# Altium PCB PCB_TKeyboard2_2021-07-30.pcbdoc
Units mil, origin at the board's own origin, x right, y up, seen from the top; angles counter-clockwise.
Board outline 8230 x 5770 mil, 2 copper layers (Top Layer, Bottom Layer); 75 components, 74 nets, 389 pads, 30 vias.
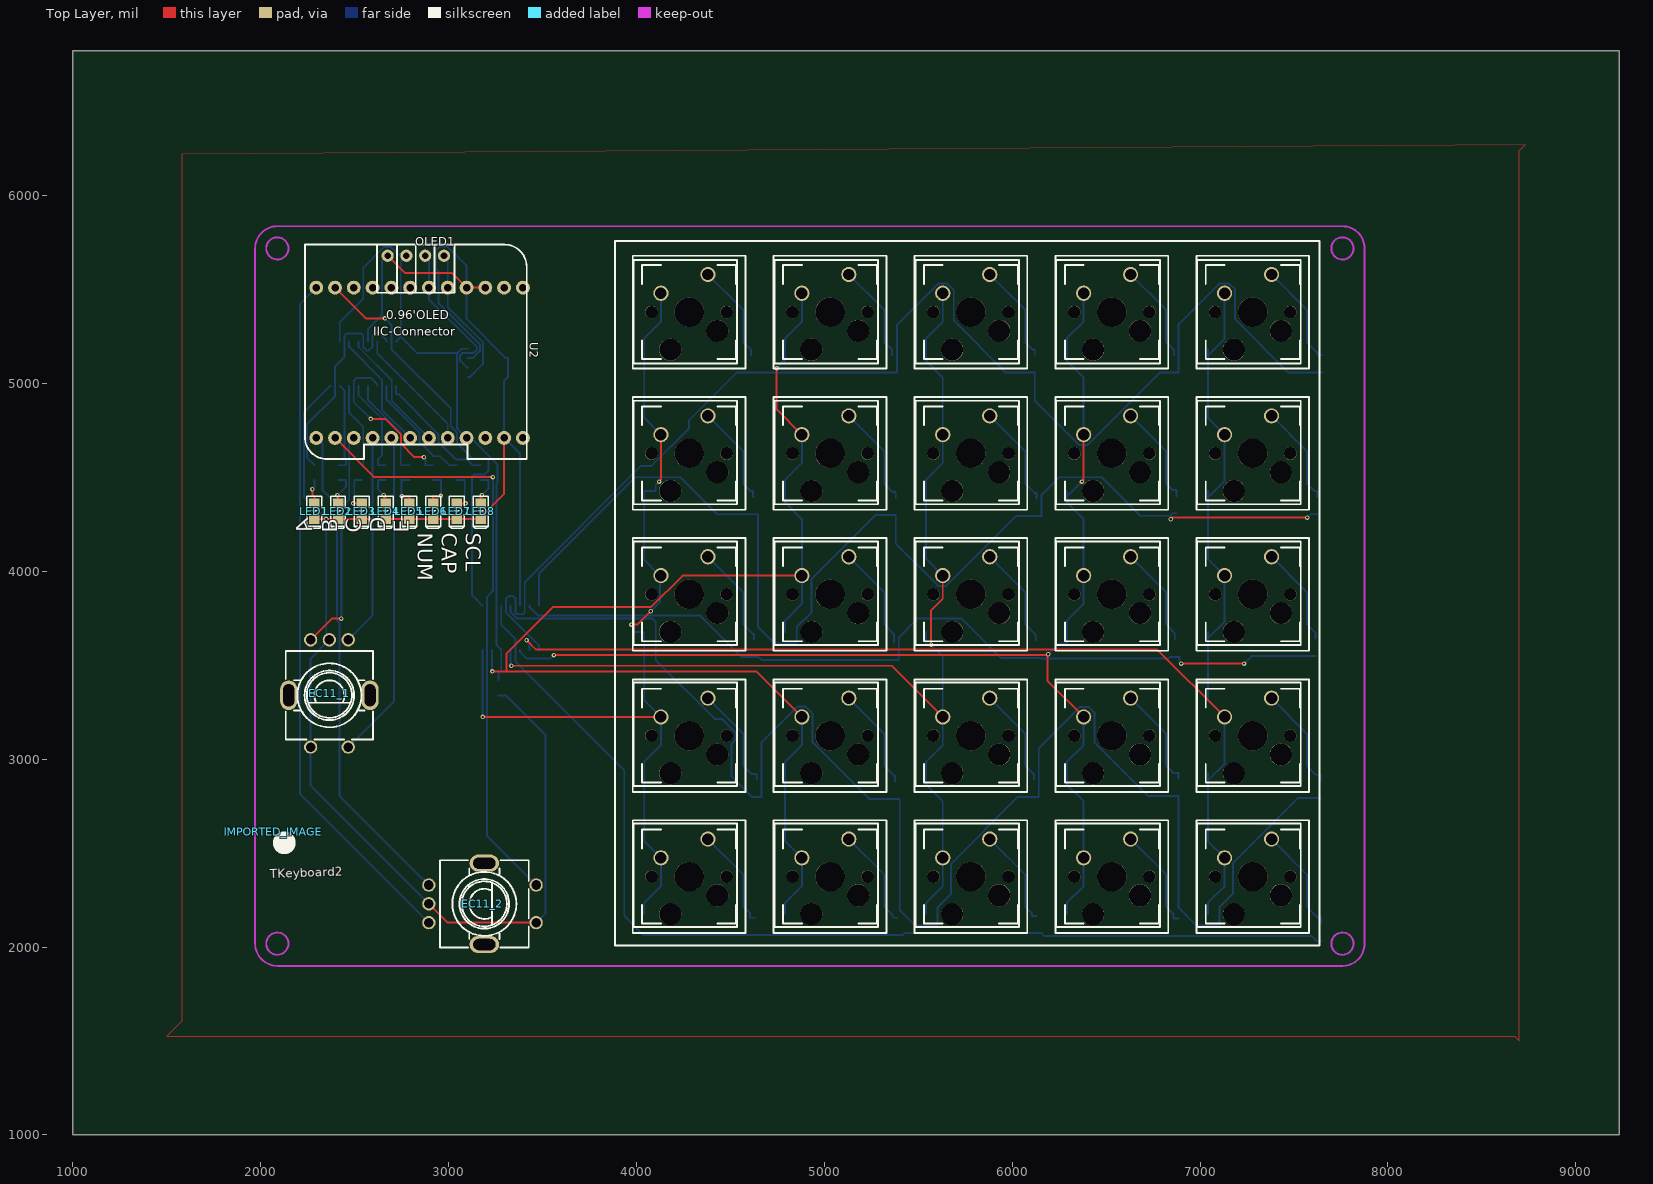
[diagram p0: Top Layer view]
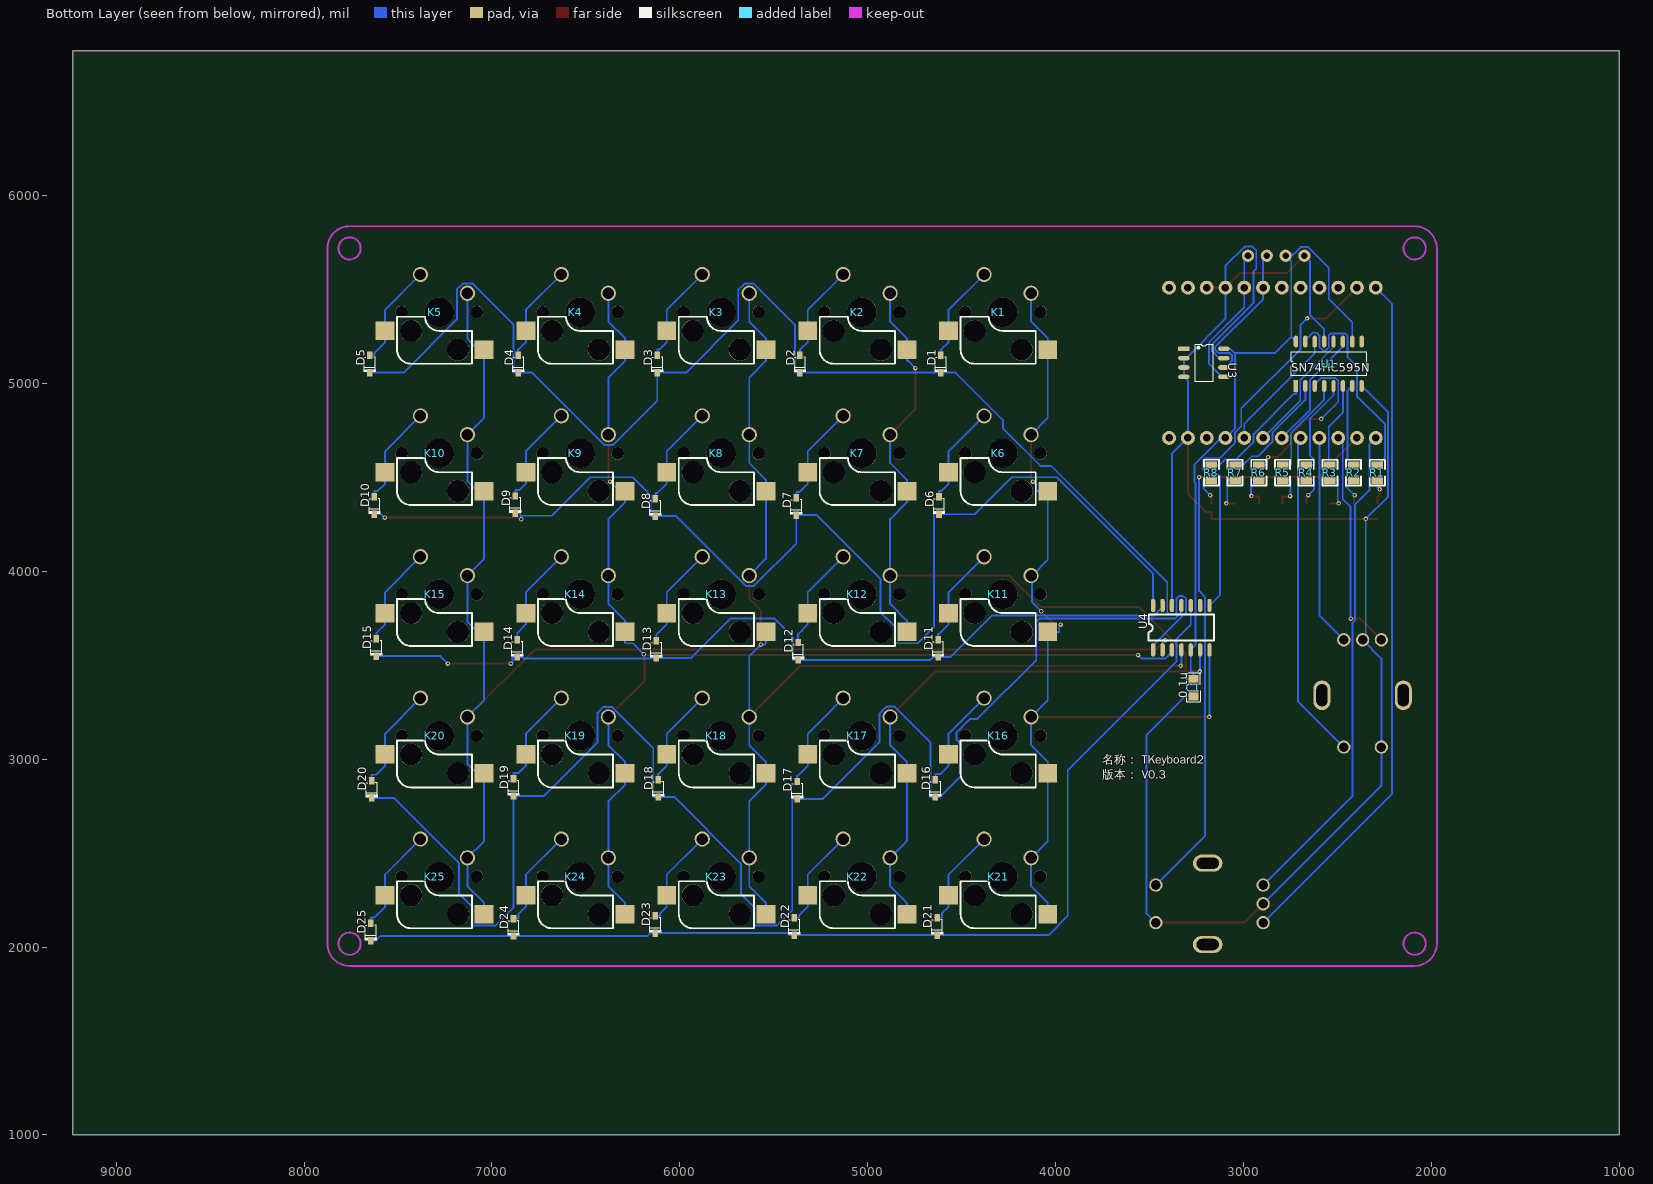
[diagram p1: Bottom Layer view, seen from below]

## Layer stack, top to bottom
Top Layer: signal copper (thickness not stored)
Dielectric: dielectric 12.6, FR-4, Dk 4.8
Bottom Layer: signal copper (thickness not stored)

## Board outline
9230,1000 1000,1000 1000,6770 9230,6770

## Components (designator, comment, footprint, x,y, rotation, side; value= is the part's Value field where it differs from the comment)
C1 "0.1u" C0805 3265,3380 r270 bottom
D1 "1N4148WS" SOD-323_L1.8-W1.3-LS2.5-RD 4610,5103.98 r270 bottom
D2 "1N4148WS" SOD-323_L1.8-W1.3-LS2.5-RD 5360,5103.98 r270 bottom
D3 "1N4148WS" SOD-323_L1.8-W1.3-LS2.5-RD 6120,5103.98 r270 bottom
D4 "1N4148WS" SOD-323_L1.8-W1.3-LS2.5-RD 6860,5103.98 r270 bottom
D5 "1N4148WS" SOD-323_L1.8-W1.3-LS2.5-RD 7650,5103.98 r270 bottom
D6 "1N4148WS" SOD-323_L1.8-W1.3-LS2.5-RD 4620,4350 r270 bottom
D7 "1N4148WS" SOD-323_L1.8-W1.3-LS2.5-RD 5380,4345 r270 bottom
D8 "1N4148WS" SOD-323_L1.8-W1.3-LS2.5-RD 6130,4340 r270 bottom
D9 "1N4148WS" SOD-323_L1.8-W1.3-LS2.5-RD 6875,4355 r270 bottom
D10 "1N4148WS" SOD-323_L1.8-W1.3-LS2.5-RD 7625,4350 r270 bottom
D11 "1N4148WS" SOD-323_L1.8-W1.3-LS2.5-RD 4625,3590 r270 bottom
D12 "1N4148WS" SOD-323_L1.8-W1.3-LS2.5-RD 5370,3575 r270 bottom
D13 "1N4148WS" SOD-323_L1.8-W1.3-LS2.5-RD 6125,3585 r270 bottom
D14 "1N4148WS" SOD-323_L1.8-W1.3-LS2.5-RD 6865,3590 r270 bottom
D15 "1N4148WS" SOD-323_L1.8-W1.3-LS2.5-RD 7615,3595 r270 bottom
D16 "1N4148WS" SOD-323_L1.8-W1.3-LS2.5-RD 4640,2845 r270 bottom
D17 "1N4148WS" SOD-323_L1.8-W1.3-LS2.5-RD 5375,2835 r270 bottom
D18 "1N4148WS" SOD-323_L1.8-W1.3-LS2.5-RD 6115,2845 r270 bottom
D19 "1N4148WS" SOD-323_L1.8-W1.3-LS2.5-RD 6885,2850 r270 bottom
D20 "1N4148WS" SOD-323_L1.8-W1.3-LS2.5-RD 7640,2840 r270 bottom
D21 "1N4148WS" SOD-323_L1.8-W1.3-LS2.5-RD 4630,2110 r270 bottom
D22 "1N4148WS" SOD-323_L1.8-W1.3-LS2.5-RD 5390,2110 r270 bottom
D23 "1N4148WS" SOD-323_L1.8-W1.3-LS2.5-RD 6130,2120 r270 bottom
D24 "1N4148WS" SOD-323_L1.8-W1.3-LS2.5-RD 6885,2105 r270 bottom
D25 "1N4148WS" SOD-323_L1.8-W1.3-LS2.5-RD 7645,2080 r270 bottom
EC11_1 "EC11E152T409" SW-TH_EC11XXXXXXXX 2365,3350 r180 top
EC11_2 "EC11E152T409" SW-TH_EC11XXXXXXXX 3180,2230 r270 top
IMPORTED_IMAGE "IMPORTED_IMAGE" IMPORTED_IMAGE 2066.05,2613.96 r0 top
K1 "CHERRY" 轴座_焊接热插拔_不带灯 4280,5380 r0 top
K2 "CHERRY" 轴座_焊接热插拔_不带灯 5030,5380 r0 top
K3 "CHERRY" 轴座_焊接热插拔_不带灯 5780,5380 r0 top
K4 "CHERRY" 轴座_焊接热插拔_不带灯 6530,5380 r0 top
K5 "CHERRY" 轴座_焊接热插拔_不带灯 7280,5380 r0 top
K6 "CHERRY" 轴座_焊接热插拔_不带灯 4280,4627.5 r0 top
K7 "CHERRY" 轴座_焊接热插拔_不带灯 5030,4627.5 r0 top
K8 "CHERRY" 轴座_焊接热插拔_不带灯 5780,4627.5 r0 top
K9 "CHERRY" 轴座_焊接热插拔_不带灯 6530,4627.5 r0 top
K10 "CHERRY" 轴座_焊接热插拔_不带灯 7280,4627.5 r0 top
K11 "CHERRY" 轴座_焊接热插拔_不带灯 4280,3877.5 r0 top
K12 "CHERRY" 轴座_焊接热插拔_不带灯 5030,3877.5 r0 top
K13 "CHERRY" 轴座_焊接热插拔_不带灯 5780,3877.5 r0 top
K14 "CHERRY" 轴座_焊接热插拔_不带灯 6530,3877.5 r0 top
K15 "CHERRY" 轴座_焊接热插拔_不带灯 7280,3877.5 r0 top
K16 "CHERRY" 轴座_焊接热插拔_不带灯 4280,3125 r0 top
K17 "CHERRY" 轴座_焊接热插拔_不带灯 5030,3125 r0 top
K18 "CHERRY" 轴座_焊接热插拔_不带灯 5780,3125 r0 top
K19 "CHERRY" 轴座_焊接热插拔_不带灯 6530,3125 r0 top
K20 "CHERRY" 轴座_焊接热插拔_不带灯 7280,3125 r0 top
K21 "CHERRY" 轴座_焊接热插拔_不带灯 4280,2375 r0 top
K22 "CHERRY" 轴座_焊接热插拔_不带灯 5030,2375 r0 top
K23 "CHERRY" 轴座_焊接热插拔_不带灯 5780,2375 r0 top
K24 "CHERRY" 轴座_焊接热插拔_不带灯 6530,2375 r0 top
K25 "CHERRY" 轴座_焊接热插拔_不带灯 7280,2375 r0 top
LED1 "LED-0805_R" LED0805_RED 2285,4320 r270 top
LED2 "LED-0805_R" LED0805_RED 2411.43,4320 r270 top
LED3 "LED-0805_R" LED0805_RED 2537.86,4320 r270 top
LED4 "LED-0805_R" LED0805_RED 2664.29,4320 r270 top
LED5 "LED-0805_R" LED0805_RED 2790.71,4320 r270 top
LED6 "LED-0805_R" LED0805_RED 2917.14,4320 r270 top
LED7 "LED-0805_R" LED0805_RED 3043.57,4320 r270 top
LED8 "LED-0805_R" LED0805_RED 3170,4320 r270 top
OLED1 "0.96OLED_4P" 0.96OLED_4P 2825,5680 r0 top
R1 "1k" R0805 2286.57,4525 r90 bottom
R2 "1k" R0805 2412.78,4525 r90 bottom
R3 "1k" R0805 2538.98,4525 r90 bottom
R4 "1k" R0805 2665.18,4525 r90 bottom
R5 "1k" R0805 2791.39,4525 r90 bottom
R6 "1k" R0805 2917.59,4525 r90 bottom
R7 "1k" R0805 3043.8,4525 r90 bottom
R8 "1k" R0805 3170,4525 r90 bottom
U1 "SN74HC595N" SOP16 2545,5105 r270 bottom
U2 "Arduino Pro Micro" "ARDUINO PRO MICRO_MINI" 3395,5510 r270 top
U3 "AT24C04C-SSHM-T" SOP8 3210,5110 r90 bottom
U4 "BC6301" SOP-14_L8.6-W3.9-P1.27-LS6.0-TL 3330,3700 r270 bottom

## Footprints (in the part's own frame and the unit in brackets; to place one, negate y for a bottom-side part, rotate by r counter-clockwise, add the part's x,y. Pads: shape width x height; smd on the part's side, far side on the other; paste and mask are expansions set on the pad)
0.96OLED_4P [mm]
  round 1.65 hole 0.89: 1(-3.81,-0.001) 2(-1.27,0.002) 3(1.27,0.002) 4(3.81,0.002)
  silkscreen extent -15,-27.5 15,1.5
"ARDUINO PRO MICRO_MINI" [mil]
  round 74 hole 40: 1(0,0) 2(0,-100) 3(0,-200) 4(0,-300) 5(0,-400) 6(0,-499.99) 7(0,-599.99) 8(0,-700) 9(0,-800) 10(0,-900) 11(0,-1000) 12(0,-1100) 13(800,-1100) 14(800,-1000) 15(800,-900) 16(800,-799.99) 17(800,-699.99) 18(800,-600) 19(800,-499.99) 20(800,-400.01) 21(800,-300) 22(800,-200) 23(800,-100) 24(800,0)
C0805 [mm]
  rect 1.41x1.35 smd: 1(1.03,0) 2(-1.03,0)
  silkscreen extent -1.96,-0.9 1.96,0.9
IMPORTED_IMAGE [mil]
  silkscreen extent 0,-118 118,0
LED0805_RED [mil]
  rect 51.2x55.1 smd: 1(-41.35,0) 2(41.35,0)
  silkscreen extent -79,-39 91,39
R0805 [mm]
  rect 1x1.55 smd: 1(1,0) 2(-1,0)
  silkscreen extent -1.75,-1.02 1.75,1.02
SOD-323_L1.8-W1.3-LS2.5-RD [mm]
  rect 1x0.75 smd: 1(1.173,0) 2(-1.173,0)
  silkscreen extent -0.9,-0.8 1.08,0.8
SOP8 [mil]
  rect 24x61 smd: 1(75,106.3)
  oval 24x61 smd: 2(25,106.3) 3(-25,106.3) 4(-75,106.3) 5(-75,-106.3) 6(-25,-106.3) 7(25,-106.3) 8(75,-106.3)
  silkscreen extent -100,-47 100,47
SOP16 [mm]
  rect 1.6x0.6 smd: 1(3,-4.445)
  oval 1.6x0.6 smd: 2(3,-3.175) 3(3,-1.905) 4(3,-0.635) 5(3,0.635) 6(3,1.905) 7(3,3.175) 8(3,4.445) 9(-3,4.445) 10(-3,3.175) 11(-3,1.905) 12(-3,0.635) 13(-3,-0.635) 14(-3,-1.905) 15(-3,-3.175) 16(-3,-4.445)
  silkscreen extent -1.6,-5.08 1.6,5.08
SOP-14_L8.6-W3.9-P1.27-LS6.0-TL [mm]
  oval 1.8x0.6 smd: 1(3,-3.81) 2(3,-2.54) 3(3,-1.27) 4(3,0) 5(3,1.27) 6(3,2.54) 7(3,3.81) 8(-3,3.81) 9(-3,2.54) 10(-3,1.27) 11(-3,0) 12(-3,-1.27) 13(-3,-2.54) 14(-3,-3.81)
  silkscreen extent -1.78,-4.44 1.75,4.4
SW-TH_EC11XXXXXXXX [mm]
  oval 2.3x4 hole 1.5 slot 3 at 90 deg: 6(5.5,0.25) 7(-5.5,0.25)
  round 1.8 hole 1.3: A(-2.54,-7.25) B(2.54,-7.25) C(0,-7.25) D(-2.54,7.25) E(2.54,7.25)
  silkscreen extent -5.9,-5.75 5.9,6.25
轴座_焊接热插拔_不带灯 [mil]
  rect 100.39x98.42 smd far side: 1(-238.76,-200) 2(288.84,-100)
  round 81 hole 61: 1(-149.91,99.99) 2(100.09,199.99)
  round 67 hole 67 unplated: ""(-199.96,0) ""(200.04,0)
  round 118.11 hole 118.11 unplated: ""(-99.96,-200) ""(150.04,-100)
  round 157 hole 157 unplated: ""(0.04,0)
  silkscreen extent -300,-300 300,300

## Via types
v1: diameter 24.02, hole 12.01, Top Layer to Bottom Layer, 30 vias

## Nets (pads, with @x,y where several pads share a name; then routed paths per layer and width w, separated by ;. In a path a pad name is that pad's centre, name@x,y a point inside that pad or via, vN(x,y) a via of type N, cw(c..) or ccw(c..) an arc to the next point about the centre after c; other vN are vias at no path point)
C0: K1.1 K6.1 K11.1 K16.1 K21.1 U4.7 | length 5090.6
  Top Layer w10: v1(3181.4,3225) K16.1@4130.08,3225 ; v1(3972.58,3716.31) 4004.47,3716.31 v1(4075.63,3787.47) ; v1@4120.15,4477.86 4130.08,4487.79 K6.1@4130.08,4727.5
  Bottom Layer w10: U4.7 3180,3226.4 v1(3181.4,3225) ; v1(3972.58,3716.31) 3979.97,3708.92 3979.97,3677.5 4041.24,3677.5 4041.24,3313.84 4130.08,3225 4130.08,3074.11 4041.24,2985.27 4041.24,2925 4041.24,2563.84 4130.08,2475 4130.08,2324.11 4041.24,2235.27 K21.1@4041.24,2175 ; v1(4075.63,3787.47) 4124.62,3836.46 K11.1@4124.62,3977.5 ; v1@4120.15,4477.86 4102.51,4460.22 4102.51,4427.5 4041.24,4427.5 4041.24,4060.88 K11.1@4124.62,3977.5 ; K11.1@4130.08,3977.5 K11.1@4124.62,3977.5 ; K6.1@4130.08,4727.5 4041.24,4816.34 4041.24,5180 4041.24,5240.27 4130.08,5329.11 K1.1@4130.08,5480
  other v1: 4120.15,4477.86
C1: K2.1 K7.1 K12.1 K17.1 K22.1 U4.6 | length 6892.8
  Top Layer w10: v1(3233.01,3467.23) 3307.4,3467.23 ; v1(4745.22,5081.89) 4745.22,4862.36 K7.1@4880.08,4727.5 ; K17.1@4880.08,3225 4637.85,3467.23 3307.4,3467.23 ; K12.1@4880.08,3977.5 4245.05,3977.5 4078.1,3810.55 3555.68,3810.55 3307.4,3562.27 3307.4,3467.23
  Bottom Layer w10: U4.6 3230,3470.24 v1(3233.01,3467.23) ; v1(4745.22,5081.89) 4783.06,5119.73 4791.24,5119.73 4791.24,5180 4791.24,5240.27 4880.08,5329.11 K2.1@4880.08,5480 ; K22.1@4791.24,2175 4791.24,2235.27 4880.08,2324.11 4880.08,2475 4791.24,2563.84 4791.24,2925 4791.24,2985.27 4880.08,3074.11 K17.1@4880.08,3225 ; K12.1@4791.24,3677.5 4791.24,3737.77 4880.08,3826.61 4880.08,3977.5 4880.08,4278.39 4791.24,4367.23 4791.24,4427.5 4791.24,4487.77 4880.08,4576.61 K7.1@4880.08,4727.5
C2: K3.1 K8.1 K13.1 K18.1 K23.1 U4.4 | length 6198.7
  Top Layer w10: v1(3334.39,3497.65) 5357.43,3497.65 K18.1@5630.08,3225 ; v1(5568.29,3610.24) 5568.29,3792.43 5630.08,3854.22 K13.1@5630.08,3977.5
  Bottom Layer w10: U4.4 3330,3502.04 v1(3334.39,3497.65) ; K23.1@5541.24,2175 5541.24,2235.27 5630.08,2324.11 5630.08,2475 5630.08,2775.89 5541.24,2864.73 5541.24,2925 5541.24,2985.27 5630.08,3074.11 5630.08,3225 5630.08,3548.45 v1(5568.29,3610.24) 5548.23,3610.24 5541.24,3617.23 K13.1@5541.24,3677.5 ; K13.1@5630.08,3977.5 5541.24,4066.34 5541.24,4427.5 5541.24,4487.77 5630.08,4576.61 5630.08,4727.5 5630.08,5030.89 5541.24,5119.73 5541.24,5180 5541.24,5240.27 5630.08,5329.11 K3.1@5630.08,5480
C3: K4.1 K9.1 K14.1 K19.1 K24.1 U4.3 | length 6618
  Top Layer w10: v1(3560.02,3554.44) v1@6186.93,3554.44 ; v1(6191.29,3558.8) v1@6186.93,3554.44 ; v1(6371.09,4477.7) 6380.08,4486.69 K9.1@6380.08,4727.5 ; K19.1@6380.08,3225 6186.93,3418.15 v1@6186.93,3554.44
  Bottom Layer w10: U4.3 3380,3570.55 3415.44,3535.11 3540.69,3535.11 v1(3560.02,3554.44) ; v1(6191.29,3558.8) 6249.72,3617.23 6291.24,3617.23 6291.24,3677.5 6291.24,3737.77 6380.08,3826.61 6380.08,3977.5 6380.08,4278.39 6291.24,4367.23 K9.1@6291.24,4397.37 ; K24.1@6291.24,2175 6291.24,2235.27 6380.08,2324.11 6380.08,2475 6380.08,2775.89 6291.24,2864.73 6291.24,2894.87 6291.24,2925 6291.24,2985.27 6380.08,3074.11 K19.1@6380.08,3225 ; K9.1@6291.24,4427.5 K9.1@6291.24,4397.37 ; v1(6371.09,4477.7) 6371.09,4477.22 K9.1@6291.24,4397.37 ; K9.1@6380.08,4727.5 6380.08,5030.89 6291.24,5119.73 6291.24,5180 6291.24,5240.27 6380.08,5329.11 K4.1@6380.08,5480
C4: K5.1 K10.1 K15.1 K20.1 K25.1 U4.2 | length 7814.6
  Top Layer w10: v1(3414.71,3633.44) 3464.91,3583.24 6771.84,3583.24 K20.1@7130.08,3225
  Bottom Layer w10: v1(3414.71,3633.44) 3430,3618.15 U4.2 ; K25.1@7041.24,2175 7041.24,2235.27 7130.08,2324.11 7130.08,2475 7041.24,2563.84 7041.24,2866.83 ; K20.1@7041.24,2925 7041.24,2866.83 ; K15.1@7041.24,3677.5 7041.24,3617.24 ; K10.1@7041.24,4427.5 7041.24,4367.45 ; K5.1@7041.24,5180 7041.24,5122.49 ; K5.1@7130.08,5480 7130.08,5237.01 7041.24,5148.17 7041.24,5122.49 ; 7041.24,2866.83 7041.24,2886.49 7130.08,2975.33 7130.08,3225 7041.24,3313.84 7041.24,3617.24 ; 7041.24,3617.24 7041.24,3643.88 7130.08,3732.72 7130.08,3977.5 7041.24,4066.34 7041.24,4367.45 ; 7041.24,4367.45 7041.24,4392.73 7130.08,4481.57 7130.08,4727.5 7041.24,4816.34 7041.24,5122.49
CLK1: EC11_1.B U2.15 | length 1199.5
  Top Layer w10: EC11_1.B 2378.19,3748.61 v1(2428.8,3748.61)
  Bottom Layer w10: v1(2428.8,3748.61) 2428.8,4342.78 2470.46,4384.44 2470.46,4685.46 U2.15
CLK2: EC11_2.B U2.12 | length 3700.5
  Bottom Layer w10: U2.12 2207.93,5422.93 2207.93,2816.63 EC11_2.B
CLOCK: U1.11 U2.18 | length 647.7
  Bottom Layer w10: U1.11 2470,5194.38 2645,5019.38 2645,4860 U2.18
DATA: U1.14 U2.20 | length 668.4
  Bottom Layer w10: U1.14 2620,5160.9 2995,4785.9 U2.20
DT1: EC11_1.A U2.16 | length 1128.4
  Bottom Layer w10: EC11_1.A 2595,3765.42 U2.16
DT2: EC11_2.A U2.13 | length 2628.3
  Bottom Layer w10: U2.13 2328.9,4676.1 2328.9,4430.72 2405.72,4353.9 2405.72,3739.05 2418.5,3726.27 2418.5,2806.06 EC11_2.A
GND: C1.1 EC11_1.C EC11_1.E EC11_2.C EC11_2.E LED1.2 LED2.2 LED3.2 LED4.2 LED5.2 LED6.2 LED7.2 LED8.2 OLED1.1 U1.8 U1.13 U2.3 U2.4 U2.23 U3.2 U3.3 U3.4 U3.7 U4.12 | length 10492.4
  Top Layer w10: LED1.2 v1(2348.22,4278.65) LED2.2 LED3.2 LED4.2 LED5.2 LED6.2 LED7.2 LED8.2 3170,4315.32 3197.5,4315.32 3295,4412.82 U2.23 ; OLED1.1@2675,5679.95 2766.73,5588.22 3016.78,5588.22 U2.4 U2.3 ; EC11_2.C 2994.56,2130 EC11_2.E
  Bottom Layer w10: U1.8 2229.44,4846.33 2229.44,4397.43 v1(2348.22,4278.65) 2348.22,3652.22 EC11_1.C 2265.01,3535.43 EC11_1.E 2265.01,2859.55 EC11_2.C ; U1.13 2570,5288.39 2645,5363.39 2645,5649.95 OLED1.1@2675,5679.95 ; U3.7 3128.08,5135 3166.59,5173.51 3166.59,5207.57 2945,5429.16 2945,5596.29 2931.44,5609.85 2931.44,5708.13 2951.75,5728.44 2992.39,5728.44 3095,5625.83 U2.4 3095,5344.64 3304.64,5135 U3.2 U3.3 U3.4 3295,5013.7 U2.23 3380,4625 U4.12 ; C1.1 3302.65,3339.45 3515.6,3126.5 3515.6,2180.17 EC11_2.E
K1_2: D1.2 K1.2 | length 526.5
  Bottom Layer w10: K1.2@4380.08,5580 4568.84,5391.24 4568.84,5280 4568.84,5219.73 4607.68,5180.89 4610,5180.89 D1.2
K2_2: D2.2 K2.2 | length 526.5
  Bottom Layer w10: K2.2@5130.08,5580 5318.84,5391.24 5318.84,5280 5318.84,5219.73 5357.68,5180.89 5360,5180.89 D2.2
K3_2: D3.2 K3.2 | length 536.5
  Bottom Layer w10: K3.2@5880.08,5580 6068.84,5391.24 6068.84,5280 6068.84,5219.73 6107.68,5180.89 6120,5180.89 D3.2
K4_2: D4.2 K4.2 | length 526.5
  Bottom Layer w10: K4.2@6630.08,5580 6818.84,5391.24 6818.84,5280 6818.84,5219.73 6857.68,5180.89 6860,5180.89 D4.2
K5_2: D5.2 K5.2 | length 556.8
  Bottom Layer w10: K5.2@7380.08,5580 7568.84,5391.24 7568.84,5280 7568.84,5219.73 7624.17,5164.4 7624.17,5150.14 D5.2
K6_2: D6.2 K6.2 | length 537.1
  Bottom Layer w10: K6.2@4380.08,4827.5 4568.84,4638.74 4568.84,4527.5 4568.84,4467.23 4609.15,4426.92 4620,4426.92 D6.2
K7_2: D7.2 K7.2 | length 549.1
  Bottom Layer w10: K7.2@5130.08,4827.5 5318.84,4638.74 5318.84,4527.5 5318.84,4467.23 5364.15,4421.92 5380,4421.92 D7.2
K8_2: D8.2 K8.2 | length 551.2
  Bottom Layer w10: K8.2@5880.08,4827.5 6068.84,4638.74 6068.84,4527.5 6068.84,4467.23 6119.15,4416.92 6130,4416.92 D8.2
K9_2: D9.2 K9.2 | length 540
  Bottom Layer w10: K9.2@6630.08,4827.5 6818.84,4638.74 6818.84,4527.5 6818.84,4467.23 6854.15,4431.92 6875,4431.92 D9.2
K10_2: D10.2 K10.2 | length 542.1
  Bottom Layer w10: K10.2@7380.08,4827.5 7568.84,4638.74 7568.84,4527.5 7568.84,4467.23 7609.15,4426.92 7625,4426.92 D10.2
K11_2: D11.2 K11.2 | length 546.2
  Bottom Layer w10: K11.2@4380.08,4077.5 4568.84,3888.74 4568.84,3777.5 4568.84,3717.23 4619.15,3666.92 4625,3666.92 D11.2
K12_2: D12.2 K12.2 | length 555.7
  Bottom Layer w10: K12.2@5130.08,4077.5 5318.84,3888.74 5318.84,3777.5 5318.84,3717.23 5370,3666.07 D12.2
K13_2: D13.2 K13.2 | length 548.3
  Bottom Layer w10: K13.2@5880.08,4077.5 6068.84,3888.74 6068.84,3777.5 6068.84,3717.23 6124.15,3661.92 6125,3661.92 D13.2
K14_2: D14.2 K14.2 | length 538.6
  Bottom Layer w10: K14.2@6630.08,4077.5 6818.84,3888.74 6818.84,3777.5 6818.84,3717.23 6865,3671.07 D14.2
K15_2: D15.2 K15.2 | length 534.1
  Bottom Layer w10: K15.2@7380.08,4077.5 7568.84,3888.74 7568.84,3777.5 7568.84,3717.23 7614.15,3671.92 7615,3671.92 D15.2
K16_2: D16.2 K16.2 | length 558.1
  Bottom Layer w10: K16.2@4380.08,3325 4568.84,3136.24 4568.84,3025 4568.84,2964.73 4611.65,2921.92 4640,2921.92 D16.2
K17_2: D17.2 K17.2 | length 547.3
  Bottom Layer w10: K17.2@5130.08,3325 5318.84,3136.24 5318.84,3025 5318.84,2964.73 5371.65,2911.92 5375,2911.92 D17.2
K18_2: D18.2 K18.2 | length 533.1
  Bottom Layer w10: K18.2@5880.08,3325 6068.84,3136.24 6068.84,3025 6068.84,2964.73 6111.65,2921.92 6115,2921.92 D18.2
K19_2: D19.2 K19.2 | length 551
  Bottom Layer w10: K19.2@6630.08,3325 6818.84,3136.24 6818.84,3025 6818.84,2964.73 6856.65,2926.92 6885,2926.92 D19.2
K20_2: D20.2 K20.2 | length 560.2
  Bottom Layer w10: K20.2@7380.08,3325 7568.84,3136.24 7568.84,3025 7568.84,2964.73 7616.65,2916.92 7640,2916.92 D20.2
K21_2: D21.2 K21.2 | length 537.5
  Bottom Layer w10: K21.2@4380.08,2575 4568.84,2386.24 4568.84,2275 4568.84,2214.73 4604.17,2179.4 4604.17,2156.16 D21.2
K22_2: D22.2 K22.2 | length 541.6
  Bottom Layer w10: K22.2@5130.08,2575 5318.84,2386.24 5318.84,2275 5318.84,2214.73 5364.17,2169.4 5364.17,2156.16 D22.2
K23_2: D23.2 K23.2 | length 527.5
  Bottom Layer w10: K23.2@5880.08,2575 6068.84,2386.24 6068.84,2275 6068.84,2214.73 6104.17,2179.4 6104.17,2166.16 D23.2
K24_2: D24.2 K24.2 | length 544.6
  Bottom Layer w10: K24.2@6630.08,2575 6818.84,2386.24 6818.84,2275 6818.84,2214.73 6859.17,2174.4 6859.17,2151.16 D24.2
K25_2: D25.2 K25.2 | length 569.3
  Bottom Layer w10: K25.2@7380.08,2575 7568.84,2386.24 7568.84,2275 7568.84,2214.73 7626.65,2156.92 7645,2156.92 D25.2
KEY_TX: U2.11 U4.8 | length 2226.7
  Top Layer w10: U2.11 2558.68,5346.32 v1(2660.57,5346.32)
  Bottom Layer w10: v1(2660.57,5346.32) 2695,5311.89 2695,5182.99 3011.1,4866.89 3011.1,4771.13 3045,4737.23 3045,4682.92 3127.94,4599.98 3205.02,4599.98 3211.59,4593.41 3211.59,4536.54 3191.44,4516.39 3134.91,4516.39 3125.01,4506.49 3125.01,3873.1 U4.8
LATCH: U1.12 U2.19 | length 668.4
  Bottom Layer w10: U1.12 2520,5194.09 2697.12,5016.97 2697.12,4907.88 U2.19
LED1: R1.1 U1.15 | length 1193.6
  Bottom Layer w10: R1.1 2245.54,4605.4 2245.54,4782.84 2395,4932.3 2395,5090.69 2446.41,5142.1 2446.41,5256.92 2455.17,5265.68 2535.77,5265.68 2545,5256.45 2545,5191.86 2562.84,5174.02 2572.97,5174.02 2595,5196.05 2595,5254.57 2610.29,5269.86 2630.9,5269.86 2670,5230.76 U1.15
LED2: R2.1 U1.7 | length 478.3
  Bottom Layer w10: R2.1 2454.36,4564.37 2454.36,4592.2 2446.43,4600.13 2446.43,4960.46 U1.7
LED3: R3.1 U1.6 | length 456.1
  Bottom Layer w10: U1.6 2470,4844.27 2545,4769.27 2545,4570.39 R3.1
LED3_1: LED3.1 R3.2 | length 213.6
  Top Layer w10: v1@2492.25,4361.35 LED3.1@2537.86,4361.35
  Bottom Layer w10: v1@2492.25,4361.35 2497.4,4366.5 2497.4,4485.63 R3.2
  other v1: 2492.25,4361.35
LED4: R4.1 U1.5 | length 524.7
  Bottom Layer w10: U1.5 2520,4938.44 2645,4813.44 2645,4616.53 2623.6,4595.13 2623.6,4564.37 R4.1
LED4_1: LED4.1 R4.2 | length 184.2
  Top Layer w10: v1(2654.01,4405.78) 2661.77,4398.02 2664.29,4398.02 LED4.1@2664.29,4361.35
  Bottom Layer w10: v1(2654.01,4405.78) 2623.6,4436.19 2623.6,4485.63 R4.2
LED5: R5.1 U1.4 | length 538.6
  Bottom Layer w10: U1.4 2570,4912.23 2744.99,4737.24 2744.99,4569.18 2749.8,4564.37 R5.1
LED5_1: LED5.1 R5.2 | length 204.3
  Top Layer w10: v1(2751.16,4400.9) 2754.04,4398.02 2790.71,4398.02 LED5.1@2790.71,4361.35
  Bottom Layer w10: v1(2751.16,4400.9) 2749.8,4402.26 2749.8,4485.63 R5.2
LED6: R6.1 U1.3 | length 878.3
  Top Layer w10: v1(2585.37,4810.99) 2662.32,4810.99 2746.92,4726.39 2746.92,4678.04 2817.27,4607.69 v1@2868.15,4607.69
  Bottom Layer w10: v1(2585.37,4810.99) 2495,4901.36 2495,5014.15 2510.49,5029.64 2585.93,5029.64 2620,4995.57 U1.3 ; v1@2868.15,4607.69 2876.01,4599.83 2876.01,4564.37 R6.1
  other v1: 2868.15,4607.69
LED6_1: LED6.1 R6.2 | length 204.8
  Top Layer w10: LED6.1@2917.14,4361.35 2917.14,4398.02 2953.81,4398.02 v1(2956.97,4401.18)
  Bottom Layer w10: R6.2 2959.17,4485.63 2959.17,4403.38 v1(2956.97,4401.18)
LED7: R7.1 U1.2 | length 621
  Bottom Layer w10: U1.2 2670,4912.23 2845,4737.23 2845,4688.69 2921,4612.69 2953.89,4612.69 3002.21,4564.37 R7.1
LED7_1: LED7.1 R7.2 | length 214.4
  Top Layer w10: LED7.1@3043.57,4361.35 v1@3090.14,4361.35
  Bottom Layer w10: R7.2 3085.38,4485.63 3085.38,4366.11 v1@3090.14,4361.35
  other v1: 3090.14,4361.35
LED8: R8.1 U1.1 | length 674.1
  Bottom Layer w10: U1.1 2720,4944.32 2731.43,4944.32 2945,4730.75 2945,4689.45 3039.32,4595.13 3097.66,4595.13 3128.42,4564.37 R8.1
LED8_1: LED8.1 R8.2 | length 183.1
  Top Layer w10: LED8.1@3170,4361.35 3170,4398.02 v1(3177.02,4405.04)
  Bottom Layer w10: R8.2 3211.58,4485.63 3211.58,4439.6 v1(3177.02,4405.04)
R0: D1.1 D2.1 D3.1 D4.1 D5.1 U4.1 | length 7112.4
  Bottom Layer w10: U4.1 3480,3606.77 3305,3781.77 3305,3853.32 3319.67,3867.99 3343.21,3867.99 3355,3856.2 3355,3780.15 3363.55,3771.6 3394.83,3771.6 3405,3781.77 3405,3942.87 4022.81,4560.68 4079.17,4560.68 4279.84,4761.35 4279.84,4805.51 4532.14,5057.81 D1.1 D2.1 5385.83,5057.81 5385.83,5311.1 5606.32,5531.59 5655.02,5531.59 5688.77,5497.84 5688.77,5335.53 5966.49,5057.81 D3.1 6120,4907.88 6355.8,4672.08 6399.79,4672.08 6785.52,5057.81 D4.1 6872.92,5057.81 6885.83,5057.81 6885.83,5316.16 7101.26,5531.59 7155.02,5531.59 7186.28,5500.33 7186.28,5341.92 7470.39,5057.81 D5.1
R1: D6.1 D7.1 D8.1 D9.1 D10.1 U4.14 | length 6383.9
  Top Layer w10: v1(6844.04,4277.88) 6852.34,4286.18 v1(7570.34,4286.18)
  Bottom Layer w10: U4.14 3480,3987.21 3993.73,4500.94 4231.6,4500.94 4428.7,4303.84 D6.1 4645.83,4303.84 4645.83,3705.14 4733.75,3617.22 4849.59,3617.22 4852.52,3620.15 4852.52,3703.98 4931.66,3783.12 4931.66,3959.58 5270.92,4298.84 D7.1 5380,4147.73 5605.65,3922.08 5647.62,3922.08 6019.38,4293.84 D8.1 6142.92,4293.84 6155.83,4293.84 6155.83,4407.58 6249.03,4500.78 6476.79,4500.78 6681.64,4295.93 6844.04,4295.93 ; v1(6844.04,4277.88) 6844.04,4295.93 ; D9.1 6849.17,4308.84 6849.17,4301.06 6844.04,4295.93 ; v1(7570.34,4286.18) 7588,4303.84 D10.1
R1_2: LED1.1 R1.2 | length 133.2
  Top Layer w10: v1(2275.01,4437.03) 2275.01,4408.01 2285,4398.02 LED1.1@2285,4361.35
  Bottom Layer w10: v1(2275.01,4437.03) 2286.57,4448.59 R1.2
R2: D11.1 D12.1 D13.1 D14.1 D15.1 U4.13 | length 4608.3
  Top Layer w10: v1(6900.05,3508.79) v1(7234.14,3508.79)
  Bottom Layer w10: U4.13 3430,3811.03 3476.64,3764.39 4338.57,3764.39 4559.12,3543.84 D11.1 4650.83,3543.84 4665.83,3528.84 5344.17,3528.84 D12.1 5395.83,3528.84 5395.83,3647.58 5498.05,3749.8 5727.77,3749.8 5938.73,3538.84 D13.1 6137.92,3538.84 6150.83,3538.84 6153.95,3535.72 6831.05,3535.72 6839.17,3543.84 D14.1 6890.83,3543.84 6890.83,3518.01 v1(6900.05,3508.79) ; v1(7234.14,3508.79) 7274.19,3548.84 D15.1
R2_2: LED2.1 R2.2 | length 186.3
  Top Layer w10: v1@2408.17,4405.35 2408.17,4401.28 2411.43,4398.02 LED2.1@2411.43,4361.35
  Bottom Layer w10: v1@2408.17,4405.35 2454.36,4451.54 2454.36,4485.63 R2.2
  other v1: 2408.17,4405.35
R3: D16.1 D17.1 D18.1 D19.1 D20.1 U4.11 | length 8466.4
  Bottom Layer w10: U4.11 3330,3782.39 3364.09,3748.3 4085.54,3748.3 4102.52,3731.32 4102.52,3527.38 4415.32,3214.58 4454.8,3214.58 4526.49,3142.89 4526.49,3102.53 4506.3,3082.34 4506.3,2906.71 4614.17,2798.84 4631.11,2798.84 D16.1 4665.83,2798.84 4665.83,3089.76 4857.29,3281.22 4898.17,3281.22 4937.42,3241.97 4937.42,3089.14 5237.72,2788.84 D17.1 5400.83,2788.84 5400.83,2196.78 5482.89,2114.72 5599.59,2114.72 5602.52,2117.65 5602.52,2211.78 5674.02,2283.28 5674.02,2443.11 6029.75,2798.84 D18.1 6140.83,2798.84 6140.83,3059.37 6358.48,3277.02 6408.49,3277.02 6437.42,3248.09 6437.42,3089.14 6722.72,2803.84 D19.1 6885,2209.68 6979.96,2114.72 7099.59,2114.72 7102.52,2117.65 7102.52,2211.78 7174.02,2283.28 7174.02,2445.99 7521.87,2793.84 D20.1
R4: D21.1 D22.1 D23.1 D24.1 D25.1 U4.10 | length 5696.6
  Bottom Layer w10: U4.10 3280,3715.9 3355,3640.9 3355,3521.49 3934.44,2942.05 3934.44,2166.22 4036.82,2063.84 D21.1 4655.83,2063.84 D22.1 5402.92,2063.84 5415.83,2063.84 5425.83,2073.84 D23.1 6142.92,2073.84 6155.83,2073.84 6170.83,2058.84 D24.1 7594.17,2058.84 7619.17,2033.84 D25.1
S$2206: 
S$2208: 
S$2210: 
S$5257: 
S$9589: 
S$9753: 
S$9761: 
S$9809: 
S$9822: 
SCL: OLED1.3 U2.6 U3.6 | length 802.7
  Bottom Layer w10: OLED1.3@2875,5680.05 2895,5660.05 U2.6 2895,5449.42 3149.51,5194.91 3149.51,5179.41 3131.69,5161.59 3071.85,5161.59 3060.96,5150.7 3060.96,5119.96 3095.92,5085 U3.6
SDA: OLED1.4 U2.5 U3.5 | length 769.6
  Bottom Layer w10: OLED1.4@2975,5680.05 2995,5660.05 U2.5 2995,5406.89 3182.68,5219.21 3182.68,5104.05 3113.63,5035 U3.5
SW1: EC11_1.D U2.17 | length 1752.7
  Bottom Layer w10: EC11_1.D 2709.44,3308.99 2709.44,4695.56 U2.17
SW2: EC11_2.D U2.14 | length 3219.4
  Top Layer w10: U2.14 2603.42,4501.58 v1(3235.86,4501.58)
  Bottom Layer w10: v1(3235.86,4501.58) 3235.86,3895.48 3205,3864.62 3205,2590.43 EC11_2.D
VCC: C1.2 OLED1.2 U1.10 U1.16 U2.21 U3.8 U4.5 | length 3474.7
  Bottom Layer w10: U1.10 2420,5326.46 2545,5451.46 2545,5616.18 2655.09,5726.27 2695.07,5726.27 OLED1.2@2758.15,5663.2 ; U1.16 2745,5248.11 ; OLED1.2@2775,5680.05 OLED1.2@2758.15,5663.2 ; U3.8 3068.47,5185 3044.87,5161.4 ; C1.2@3265,3420.55 3265,3459.38 3280,3474.38 U4.5 3255.28,3606.61 3255.28,4469.98 3258.94,4473.64 3258.94,4568.83 3117.77,4710 U2.21 3044.87,4760.13 3044.87,5161.4 ; 2745,5248.11 2745,5650.05 OLED1.2@2758.15,5663.2 ; 2745,5248.11 2831.71,5161.4 3044.87,5161.4
pads on no net: EC11_1.6 EC11_1.7 EC11_2.6 EC11_2.7 K1. K2. K3. K4. K5. K6. K7. K8. K9. K10. K11. K12. K13. K14. K15. K16. K17. K18. K19. K20. K21. K22. K23. K24. K25. U1.9 U2.1 U2.2 U2.7 U2.8 U2.9 U2.10 U2.22 U2.24 U3.1 U4.9

## Polygon pours and split planes (outlines as drawn)
GND on Top Layer (solid): 1580,6220 1580,1605 1500,1525 8675,1525 8700,1500 8700,6240 8730,6270

## Keep-outs
Keep-Out Layer:
  circle w10 net S$9589: c2088.11,5718.9 r59.06
  circle w10 net S$9761: c2088.11,2018.11 r59.06
  circle w10 net S$9809: c7757.4,2018.11 r59.06
  circle w10 net S$9822: c7757.4,5718.9 r59.06
  lines w10: 1970,2018.11 ccw(c2088.11,2018.11) 2088.11,1900
  lines w10 net S$2206: 7757.4,1900 ccw(c7757.4,2018.11) 7875.51,2018.11
  lines w10 net S$5257: 7757.4,5837.01 cw(c7757.4,5718.9) 7875.51,5718.9
  lines w10 net S$9753: 1970,5718.9 cw(c2088.11,5718.9) 2088.11,5837.01

## Silkscreen, mask and mechanical layers (free items; w line width, h text height)
Top Overlay:
  lines w10: 3885,2007.51 7635,2007.51 7635,5757.49 3885,5757.49 3885,2007.51 ; 3984.39,2106.95 4535.55,2106.95 4535.55,2658.11 3984.39,2658.11 3984.39,2106.95 ; 3984.39,2856.95 4535.55,2856.95 4535.55,3408.11 3984.39,3408.11 3984.39,2856.95 ; 3984.39,3606.96 4535.55,3606.96 4535.55,4158.11 3984.39,4158.11 3984.39,3606.96 ; 3984.39,4356.96 4535.55,4356.96 4535.55,4908.11 3984.39,4908.11 3984.39,4356.96 ; 3984.39,5106.96 4535.55,5106.96 4535.55,5658.11 3984.39,5658.11 3984.39,5106.96 ; 4734.39,2106.95 5285.55,2106.95 5285.55,2658.11 4734.39,2658.11 4734.39,2106.95 ; 4734.39,2856.95 5285.55,2856.95 5285.55,3408.11 4734.39,3408.11 4734.39,2856.95 ; 4734.39,3606.96 5285.55,3606.96 5285.55,4158.11 4734.39,4158.11 4734.39,3606.96 ; 4734.39,4356.96 5285.55,4356.96 5285.55,4908.11 4734.39,4908.11 4734.39,4356.96 ; 4734.39,5106.96 5285.55,5106.96 5285.55,5658.11 4734.39,5658.11 4734.39,5106.96 ; 5484.39,2106.95 6035.55,2106.95 6035.55,2658.11 5484.39,2658.11 5484.39,2106.95 ; 5484.39,2856.95 6035.55,2856.95 6035.55,3408.11 5484.39,3408.11 5484.39,2856.95 ; 5484.39,3606.96 6035.55,3606.96 6035.55,4158.11 5484.39,4158.11 5484.39,3606.96 ; 5484.39,4356.96 6035.55,4356.96 6035.55,4908.11 5484.39,4908.11 5484.39,4356.96 ; 5484.39,5106.96 6035.55,5106.96 6035.55,5658.11 5484.39,5658.11 5484.39,5106.96 ; 6234.39,2106.95 6785.55,2106.95 6785.55,2658.11 6234.39,2658.11 6234.39,2106.95 ; 6234.39,2856.95 6785.55,2856.95 6785.55,3408.11 6234.39,3408.11 6234.39,2856.95 ; 6234.39,3606.96 6785.55,3606.96 6785.55,4158.11 6234.39,4158.11 6234.39,3606.96 ; 6234.39,4356.96 6785.55,4356.96 6785.55,4908.11 6234.39,4908.11 6234.39,4356.96 ; 6234.39,5106.96 6785.55,5106.96 6785.55,5658.11 6234.39,5658.11 6234.39,5106.96 ; 6984.39,2106.95 7535.55,2106.95 7535.55,2658.11 6984.39,2658.11 6984.39,2106.95 ; 6984.39,2856.95 7535.55,2856.95 7535.55,3408.11 6984.39,3408.11 6984.39,2856.95 ; 6984.39,3606.96 7535.55,3606.96 7535.55,4158.11 6984.39,4158.11 6984.39,3606.96 ; 6984.39,4356.96 7535.55,4356.96 7535.55,4908.11 6984.39,4908.11 6984.39,4356.96 ; 6984.39,5106.96 7535.55,5106.96 7535.55,5658.11 6984.39,5658.11 6984.39,5106.96
  text "A" at 2277.34,4219.33 h80 r111
  text "B" at 2407.14,4205 h80 r90
  text "C" at 2534.29,4205 h80 r90
  text "D" at 2661.43,4204.99 h80 r90
  text "E" at 2788.58,4204.99 h80 r90
  text "NUM" at 2835.71,4205 h80 r270
  text "CAP" at 2962.86,4205 h80 r270
  text "SCL" at 3090,4205 h80 r270
  text "TKeyboard2" at 2050,2350 h80 r2
Bottom Overlay:
  text "名称： TKeyboard2 / 版本： V0.3" at 3750,2880 h80

## Text inside footprints (layer, text, board x,y; h text height)
OLED1: Top Overlay "IIC-Connector" at 2598.4,5252.94 h47.24; Top Overlay "0.96'OLED" at 2667.6,5341.43 h47.24